# Altium PCB Microphone-Arm_V1.0.PcbDoc
Units mm, origin at the board's own origin, x right, y up, seen from the top; angles counter-clockwise.
Board outline 288.7 x 190.42 mm, 2 copper layers (Top Layer, Bottom Layer), stack 1.548 mm thick; 33 components, 15 nets, 115 pads, 16 vias.
Unrouted connection lines stored in the file: 95.
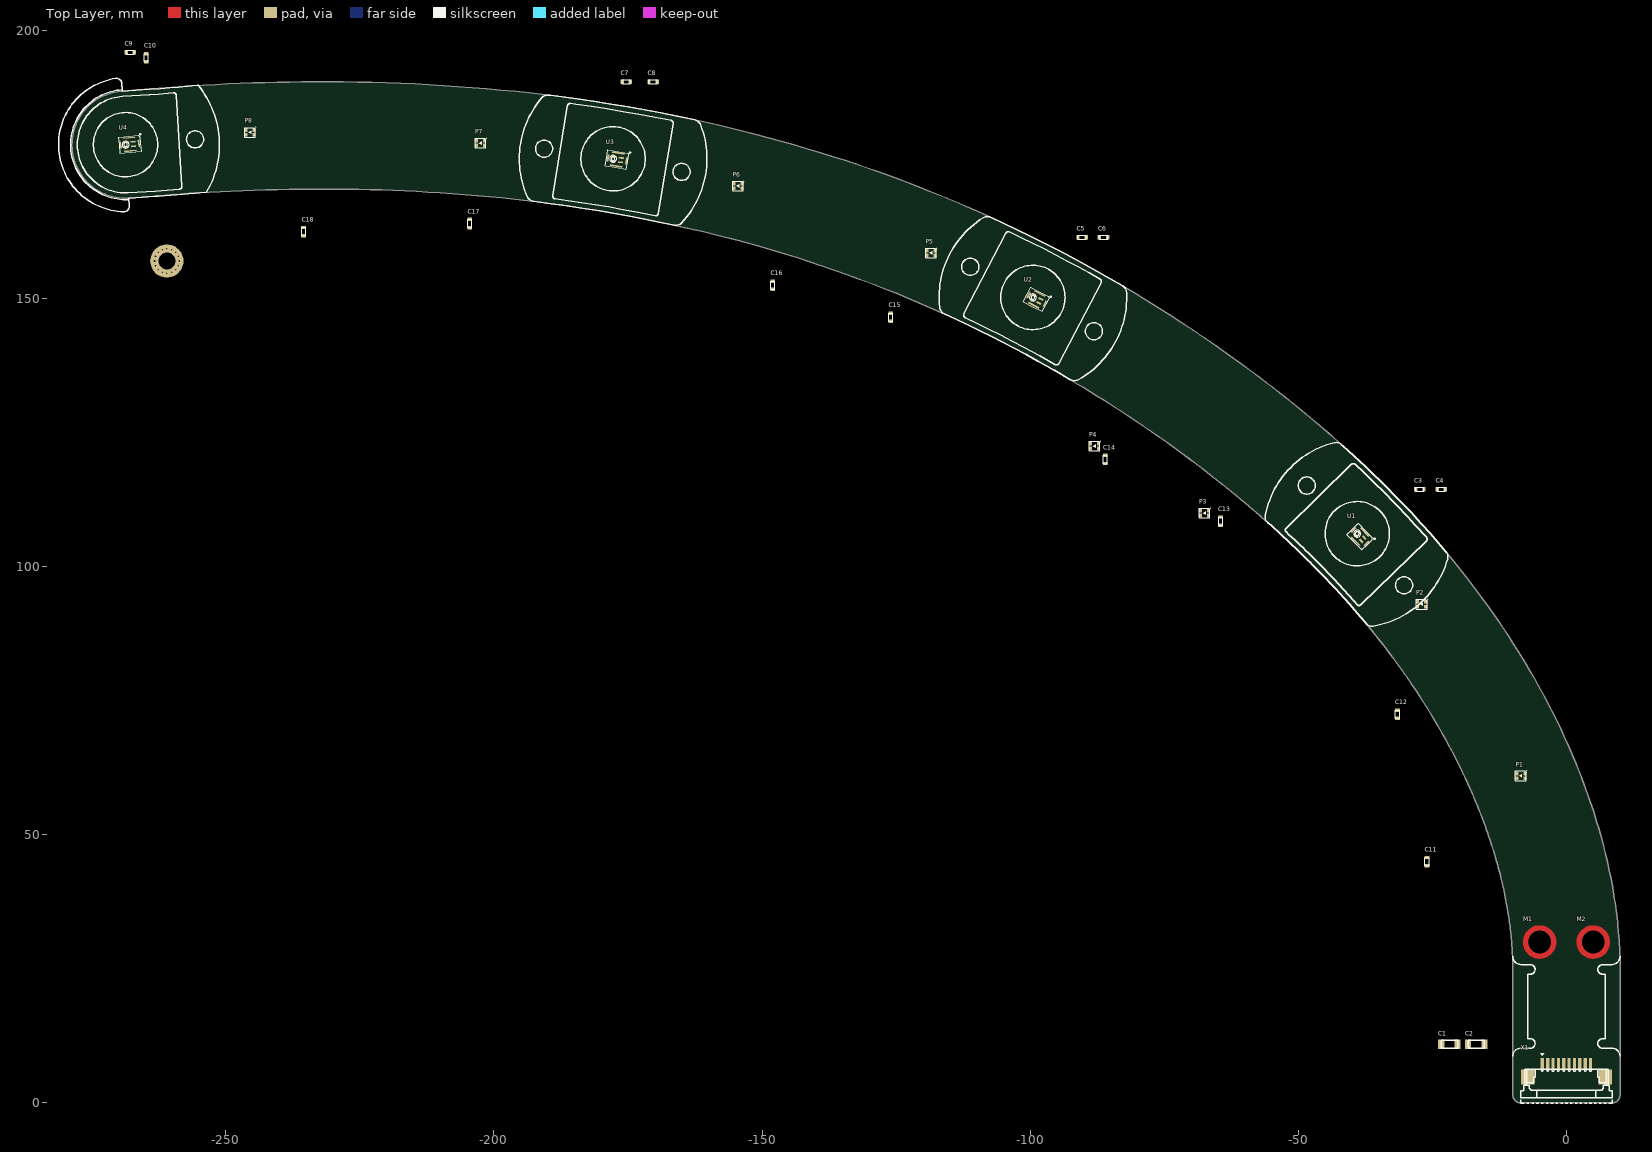
[diagram p0: Top Layer view]
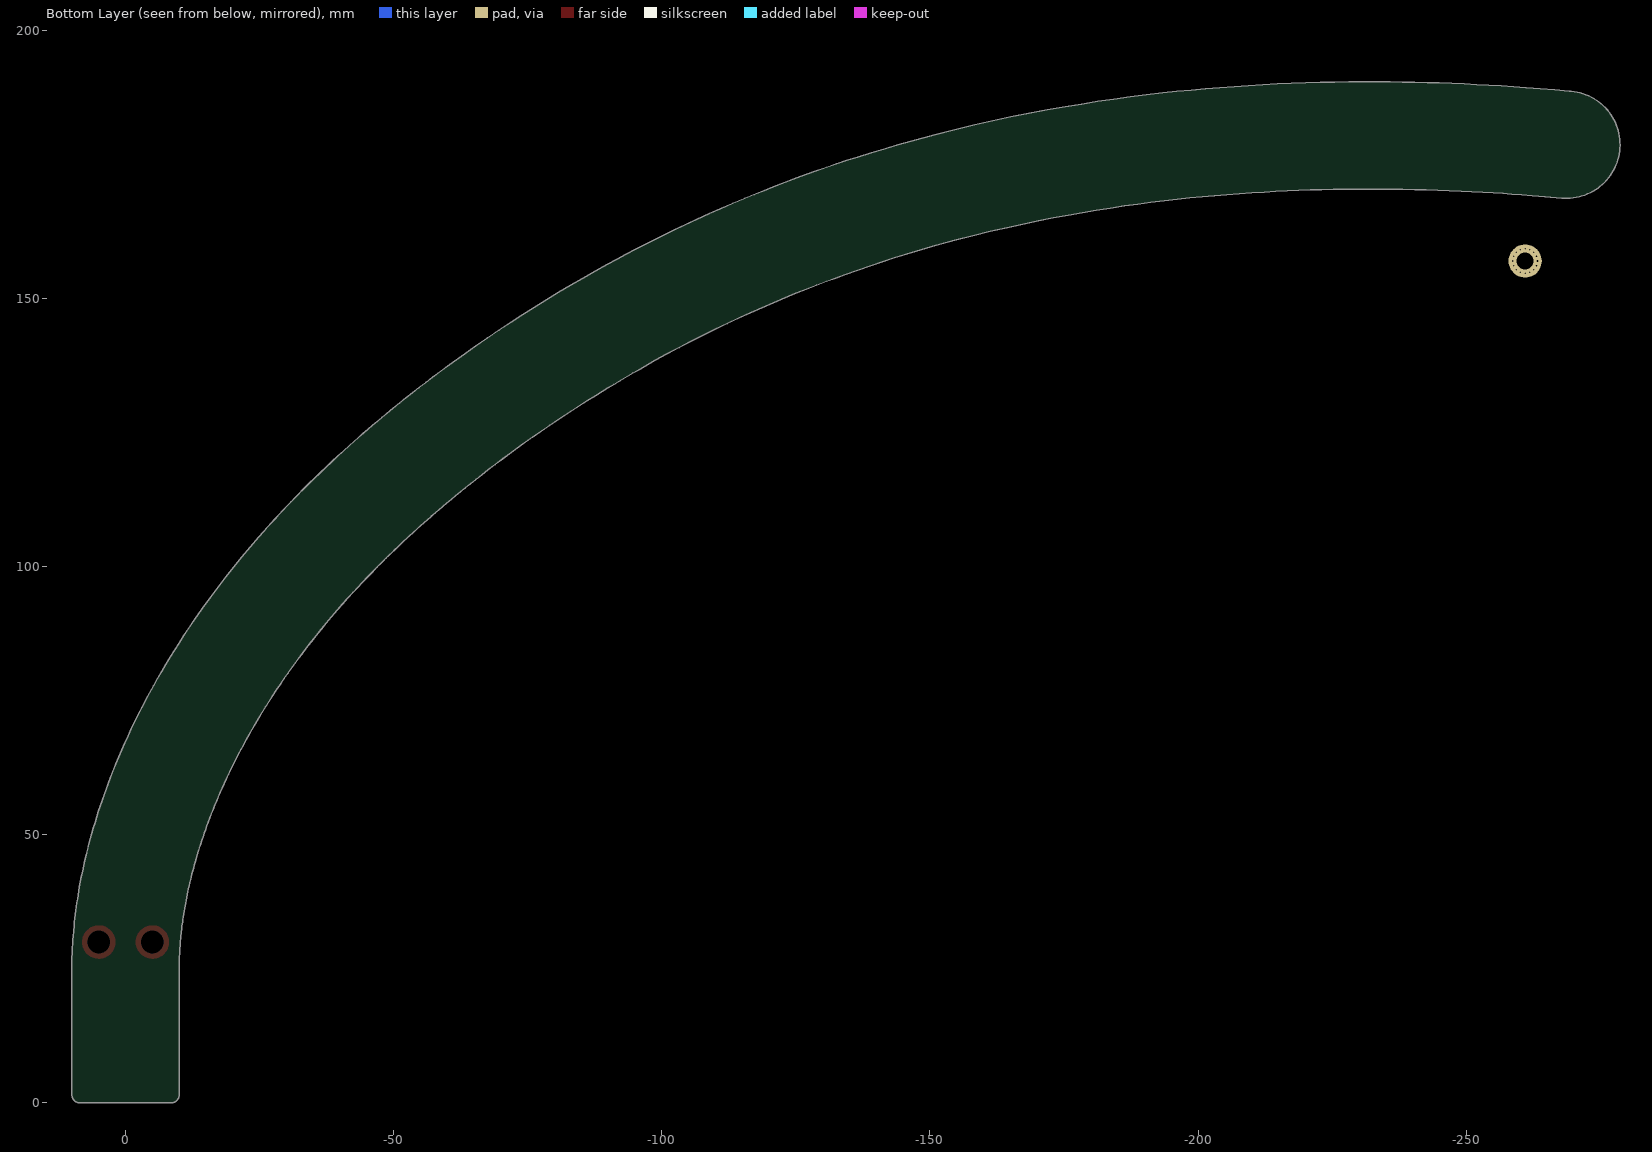
[diagram p1: Bottom Layer view, seen from below]

## Layer stack, top to bottom
Top Solder: solder mask 0.0102, Solder Resist, Dk 3.5
Top Layer: signal copper 0.0356
Dielectric1: dielectric 1.4766, FR-4, Dk 4.8
Bottom Layer: signal copper 0.0356
Bottom Solder: solder mask 0.0102, Solder Resist, Dk 3.5

## Board outline
367 vertices, not listed, extent -278.7,0 10,190.422

## Design rules (kind name [scope] priority, off if disabled: settings)
Clearance Ploygon [InPoly] p1: gap=0.254 ignorepadtopadclearanceinfootprint=FALSE
Clearance [All] p2: gap=0.127 ignorepadtopadclearanceinfootprint=FALSE
ComponentClearance ComponentClearance_Connectors [HasFootprint('SMD Inductor 7x7x4.5 NP') OR HasFootprint('MEC Display (19454)') OR HasFootprint('THT USB-A (292303-1)') OR HasFootprint('SMD HDMI Horizontal') OR HasFootprint('MEC LED-Ring (COM-14967)')] p1: gap=0 collisioncheckmode=3 verticalgap=0 showdistances=FALSE
ComponentClearance ComponentClearance_Mechanical [(Identifier = 'Washer_M3_0.5mm') OR (Identifier = 'Spacer Bolts_m3_L14') OR (Identifier = 'Spacer Bolts_m3_bn_L24') OR (Identifier = 'Spacer Bolts_m3_L24') OR (Identifier = 'Transducer-Spacer') OR (Identifier = 'LED-Grid_Bottom') OR (Identifier = 'Frontpanel') OR (Identifier = 'Baseplate') OR (Identifier = 'Backpanel') OR (Identifier = 'Sidepanel_Left') OR (Identifier = 'Sidepanel_Right') OR (Identifier = 'Camera-Mount')] p2: gap=0 collisioncheckmode=3 verticalgap=0 showdistances=FALSE
ComponentClearance [All] p3: gap=0.2 collisioncheckmode=3 verticalgap=0.2 showdistances=TRUE
DiffPairsRouting [All] p1: maxlimit=0.254 minlimit=0.127 mostfreqgap=0.127 toplayer_minwidth=0.152 toplayer_maxwidth=0.381 toplayer_prefwidth=0.152 bottomlayer_minwidth=0.152 bottomlayer_maxwidth=0.381 bottomlayer_prefwidth=0.152 maxuncoupledlength=12.7
FabricationTestPointUsage TestPointUsage [All] p1: valid=0 allowmultiple=FALSE
FabricationTestpoint Testpoint [All] p1: side=3 testpointundercomponent=TRUE minsize=1.016 maxsize=2.54 preferedsize=1.524 minholesize=0 maxholesize=1.016 preferedholesize=0.813 testpointgrid=0.025 allowsidetop=TRUE allowsidebottom=TRUE usegrid=TRUE gridtolerance=0
HoleSize [All] p1: absolutevalues=TRUE maxlimit=25.4 minlimit=0.025 maxpercent=80.000 minpercent=20.000
PolygonConnect [All] p1: thpad.connectstyle=Relief thpad.reliefconductorwidth=0.254 thpad.reliefentries=4 thpad.polygonreliefangle="90 Angle" thpad.airgapwidth=0.254 smdpad.connectstyle=Relief smdpad.reliefconductorwidth=0.254 smdpad.reliefentries=4 smdpad.polygonreliefangle="90 Angle" smdpad.airgapwidth=0.254 via.connectstyle=Direct via.reliefconductorwidth=0.254 via.reliefentries=4 via.polygonreliefangle="90 Angle" via.airgapwidth=0.254
RoutingVias [All] p1: holewidth=0.711 width=1.27 viastyle="Through Hole" minholewidth=0.711 minwidth=1.27 maxholewidth=0.711 maxwidth=1.27
SolderMaskExpansion [All] p1: expansion=0.102 istentingtop=FALSE
Width [All] p1: maxlimit=500 minlimit=0.152 preferedwidth=0.254
25 further rules are at their usual default settings.

## Components (designator, comment, footprint, x,y, rotation, side; value= is the part's Value field where it differs from the comment)
C1 "10µF" "SMD Keramikkondensator 1206" -21.83,10.92 r0 top
C2 "10µF" "SMD Keramikkondensator 1206" -16.83,10.92 r0 top
C3 "10nF" "SMD Keramikkondensator 0603" -27.33,114.42 r0 top
C4 "1µF" "SMD Keramikkondensator 0603" -23.33,114.42 r0 top
C5 "10nF" "SMD Keramikkondensator 0603" -90.33,161.42 r0 top
C6 "1µF" "SMD Keramikkondensator 0603" -86.33,161.42 r0 top
C7 "10nF" "SMD Keramikkondensator 0603" -175.33,190.42 r0 top
C8 "1µF" "SMD Keramikkondensator 0603" -170.33,190.42 r0 top
C9 "10nF" "SMD Keramikkondensator 0603" -267.83,195.92 r0 top
C10 "1µF" "SMD Keramikkondensator 0603" -264.83,194.92 r90 top
C11 "1µF" "SMD Keramikkondensator 0603" -26,45 r90 top
C12 "1µF" "SMD Keramikkondensator 0603" -31.5,72.5 r90 top
C13 "1µF" "SMD Keramikkondensator 0603" -64.5,108.5 r90 top
C14 "1µF" "SMD Keramikkondensator 0603" -86,120 r90 top
C15 "1µF" "SMD Keramikkondensator 0603" -126,146.5 r90 top
C16 "1µF" "SMD Keramikkondensator 0603" -148,152.5 r90 top
C17 "1µF" "SMD Keramikkondensator 0603" -204.5,164 r90 top
C18 "1µF" "SMD Keramikkondensator 0603" -235.5,162.5 r90 top
M1 "SMTSO-M3-3ET" "SMD Solder-Nut (M3 3mm)" -5,30 r0 top
M2 "SMTSO-M3-3ET" "SMD Solder-Nut (M3 3mm)" 5,30 r0 top
P1 "WS2812" "SMD LED WS2812B-0807" -8.5,61 r0 top
P2 "WS2812" "SMD LED WS2812B-0807" -27,93 r0 top
P3 "WS2812" "SMD LED WS2812B-0807" -67.5,110 r0 top
P4 "WS2812" "SMD LED WS2812B-0807" -88,122.5 r0 top
P5 "WS2812" "SMD LED WS2812B-0807" -118.5,158.5 r0 top
P6 "WS2812" "SMD LED WS2812B-0807" -154.5,171 r0 top
P7 "WS2812" "SMD LED WS2812B-0807" -202.5,179 r0 top
P8 "WS2812" "SMD LED WS2812B-0807" -245.5,181 r0 top
U1 "MP34DT05TR-A" "SMD Microphone (MP34DT05TR-A)" -38.473,105.599 r44.35 top
U2 "MP34DT05TR-A" "SMD Microphone (MP34DT05TR-A)" -98.806,149.849 r62.5 top
U3 "MP34DT05TR-A" "SMD Microphone (MP34DT05TR-A)" -177.013,175.942 r80.5 top
U4 "MP34DT05TR-A" "SMD Microphone (MP34DT05TR-A)" -267.924,178.772 r95.22 top
X1 "AFA07-S10FCC-00" "SMD Connector (AFA07-S10FCC-00) [Reversed]" 0,1 r0 top

## Footprints (in the part's own frame and the unit in brackets; to place one, negate y for a bottom-side part, rotate by r counter-clockwise, add the part's x,y. Pads: shape width x height; smd on the part's side, far side on the other; paste and mask are expansions set on the pad)
"SMD Connector (AFA07-S10FCC-00) [Reversed]" [mm] "SMD_LED_RED"
  rect 0.6x2.2 smd: 1(-4.5,6.25) 2(-3.5,6.25) 3(-2.5,6.25) 4(-1.5,6.25) 5(-0.5,6.25) 6(0.5,6.25) 7(1.5,6.25) 8(2.5,6.25) 9(3.5,6.25) 10(4.5,6.25)
  rect 2.5x2.8 smd: NC(-7.25,3.85) NC(7.25,3.85)
  silkscreen extent -8.5,-1.1 8.5,8.25, body extent -8.5,0 8.5,6.75, height 2.57
"SMD Keramikkondensator 0603" [mil]
  rect 25x35 smd: 1(-30,0) 2(30,0)
  silkscreen extent -30,-15 30,15, body extent -31,-16 32,16, height 32
"SMD Keramikkondensator 1206" [mil]
  rect 45x70 smd: 1(-60,0) 2(60,0)
  silkscreen extent -60,-30 60,30, body extent -63,-31 63,32, height 39
"SMD LED WS2812B-0807" [mm] "SMD_LED_RED"
  rect 0.6x0.7 smd: 1(0.75,0.45) 2(-0.75,0.45) 3(-0.75,-0.45) 4(0.75,-0.45)
  silkscreen extent -1,-0.9 1.1,1, body extent -1,-0.9 1,0.9, height 0.85
"SMD Microphone (MP34DT05TR-A)" [mm]
  rect 0.4x0.95 smd: 1(0.425,-0.675) 2(0.425,0.675) 3(-0.425,0.675) 4(-0.425,-0.675)
  rect 0.35x2.3 smd: 5(-1.225,0) 5(1.225,0)
  rect 1.3x0.35 smd: 5(0,1.725) 5(0,-1.725)
  silkscreen extent -1.5,-2.26 1.76,2, body extent -1.5,-2 1.5,2, height 1.02
"SMD Solder-Nut (M3 3mm)" [mm]
  round 0 hole 4.22: 1(0,0)
  Top Layer circle w1.02: c0,0 r2.61
  body extent -2.61,-2.61 2.61,2.61, height 3

## Part data
C1 C2: library part "E6 - 10uF", "SMD Ceramic Capacitor E6", Component Value="10µF 50V", JLC-Parts=C13585, Component Description="Multilayer Ceramic Capacitors MLCC", ComponentLink1Description=Datasheet, ComponentLink1URL=https://datasheet.lcsc.com/lcsc/1810191219_Samsung-Electro-Mechanics-CL10A106KP8NNNC_C19702.pdf, Digikey=587-3258-1-ND, Farnell=2113070, Mouser=963-LMK107BBJ106MALT, Unit Price=0.01
C3 C5 C7 C9: library part C-CAPACITOR, "CAP-MK", Component Value="10nF 50V", JLC-Parts=C57112, Component Description="Multilayer Ceramic Capacitors", Digikey=445-5662-1-ND, Farnell=2346966, Mouser=77-VJ0603V103ZXAPBC, Unit Price=0.01
C4 C6 C8 C10 C11 C12 C13 C14 C15 C16 C17 C18: library part C-CAPACITOR, "CAP-MK", Component Value="1µF 50V", JLC-Parts=C15849, Component Description="Multilayer Ceramic Capacitors", Digikey=1276-1860-1-ND, Farnell=3013383, Mouser=187-CL10A105KB8NNNC, Unit Price=0.01
M1 M2: library part M-Spacer_M3_3mm, "Solderable Standoff Nut", Component Value="M3 3mm", JLC-Parts=C2915308, Component Description="Solderable Standoff Nut", ComponentLink1Description=Datasheet, ComponentLink1URL=https://datasheet.lcsc.com/lcsc/2112061830_Sinhoo-SMTSO3030CTJ_C2915308.pdf, Mouser=153-SMTSO-M3-3ET, Unit Price=0.05
P1 P2 P3 P4 P5 P6 P7 P8: library part P-WS2812B-0807, "Smart RGB-LED", Component Value=XL-0807RGBC-WS2812B, JLC-Parts=C3646929, aliExpress=1005003999865721, Component Description="Smart RGB-LED", ComponentLink1Description=Datasheet, ComponentLink1URL=https://datasheet.lcsc.com/lcsc/2108251530_OPSCO-Optoelectronics-SK6812D-EC3210R_C2890041.pdf, Unit Price=0.07
U1 U2 U3 U4: library part U-MP34DT05TR-A, "Digital PDM MEMS Microphone (Top Port)", JLC-Parts=C2688664, Component Description="Digital PDM MEMS Microphone (Top Port)", Component Value=MP34DT05TR-A, ComponentLink1Description=Datasheet, ComponentLink1URL=https://datasheet.lcsc.com/lcsc/2106070037_STMicroelectronics-MP34DT05TR-A_C2688664.pdf, Digikey=497-17809-1-ND, Farnell=2851942, Mouser=511-MP34DT05TR-A, Unit Price=1.50
X1: library part "X-FPC-Connector (10-Pin)", "FPC-Connector (10-Pin, Slide-Lock,  Bottom Contact)", JLC-Parts=C52162, Component Description="FPC-Connector (10-Pin, Slide-Lock,  Bottom Contact)", Component Value=AFA07-S10FCC-00, ComponentLink1Description=Datasheet, ComponentLink1URL=https://datasheet.lcsc.com/lcsc/1811142212_JUSHUO-AFA07-S10FCC-00_C52162.pdf, Digikey=2073-FFC3B07-10-TCT-ND, Farnell=3873345, Mouser=640-FFC3B07-10-T, Unit Price=0.09

## Free pads (board coordinates)
  round 6.2 hole 3.2: NC(-261,157)

## Via types
v1: diameter 0.62, hole 0.3, Top Layer to Bottom Layer, tented both sides, 16 vias

## Nets (pads, with @x,y where several pads share a name; then routed paths per layer and width w, separated by ;. In a path a pad name is that pad's centre, name@x,y a point inside that pad or via, vN(x,y) a via of type N, cw(c..) or ccw(c..) an arc to the next point about the centre after c; other vN are vias at no path point)
3V3: C1.2 C3.2 C4.2 C5.2 C6.2 C7.2 C8.2 C9.2 C10.2 U1.1 U2.1 U2.2 U3.1 U4.1 U4.2 X1.4
5V: C2.2 C11.2 C12.2 C13.2 C14.2 C15.2 C16.2 C17.2 C18.2 P1.1 P2.1 P3.1 P4.1 P5.1 P6.1 P7.1 P8.1 X1.2 X1.3
GND: C1.1 C2.1 C3.1 C4.1 C5.1 C6.1 C7.1 C8.1 C9.1 C10.1 C11.1 C12.1 C13.1 C14.1 C15.1 C16.1 C17.1 C18.1 P1.3 P2.3 P3.3 P4.3 P5.3 P6.3 P7.3 P8.3 U1.2 U1.5 U2.5 U3.2 U3.5 U4.5 X1.1 X1.10
NetP1_2: P1.2 P2.4
NetP1_4: P1.4 X1.6
NetP2_2: P2.2 P3.4
NetP3_2: P3.2 P4.4
NetP4_2: P4.2 P5.4
NetP5_2: P5.2 P6.4
NetP6_2: P6.2 P7.4
NetP7_2: P7.2 P8.4
NetP8_2: P8.2 X1.5
NetU1_3: U1.3 U2.3 U3.3 U4.3 X1.9
NetU1_4: U1.4 U2.4 X1.8
NetU3_4: U3.4 U4.4 X1.7
pads on no net: M1.1 M2.1 X1.NC
copper on no net:
  other v1: -261,154.7 -261.88,154.875 -260.12,154.875 -262.626,155.374 -259.374,155.374 -263.125,156.12 -258.875,156.12 -263.3,157 -258.7,157 -263.125,157.88 -258.875,157.88 -262.626,158.626 -259.374,158.626 -261.88,159.125 -260.12,159.125 -261,159.3

## Silkscreen, mask and mechanical layers (free items; w line width, h text height)
Top Overlay:
  drawing of 243 lines, arcs and shapes, not listed
Mechanical 1:
  drawing of 366 lines, arcs and shapes, not listed